# EAGLE board Relaydumped (EAGLE 9.1.2)
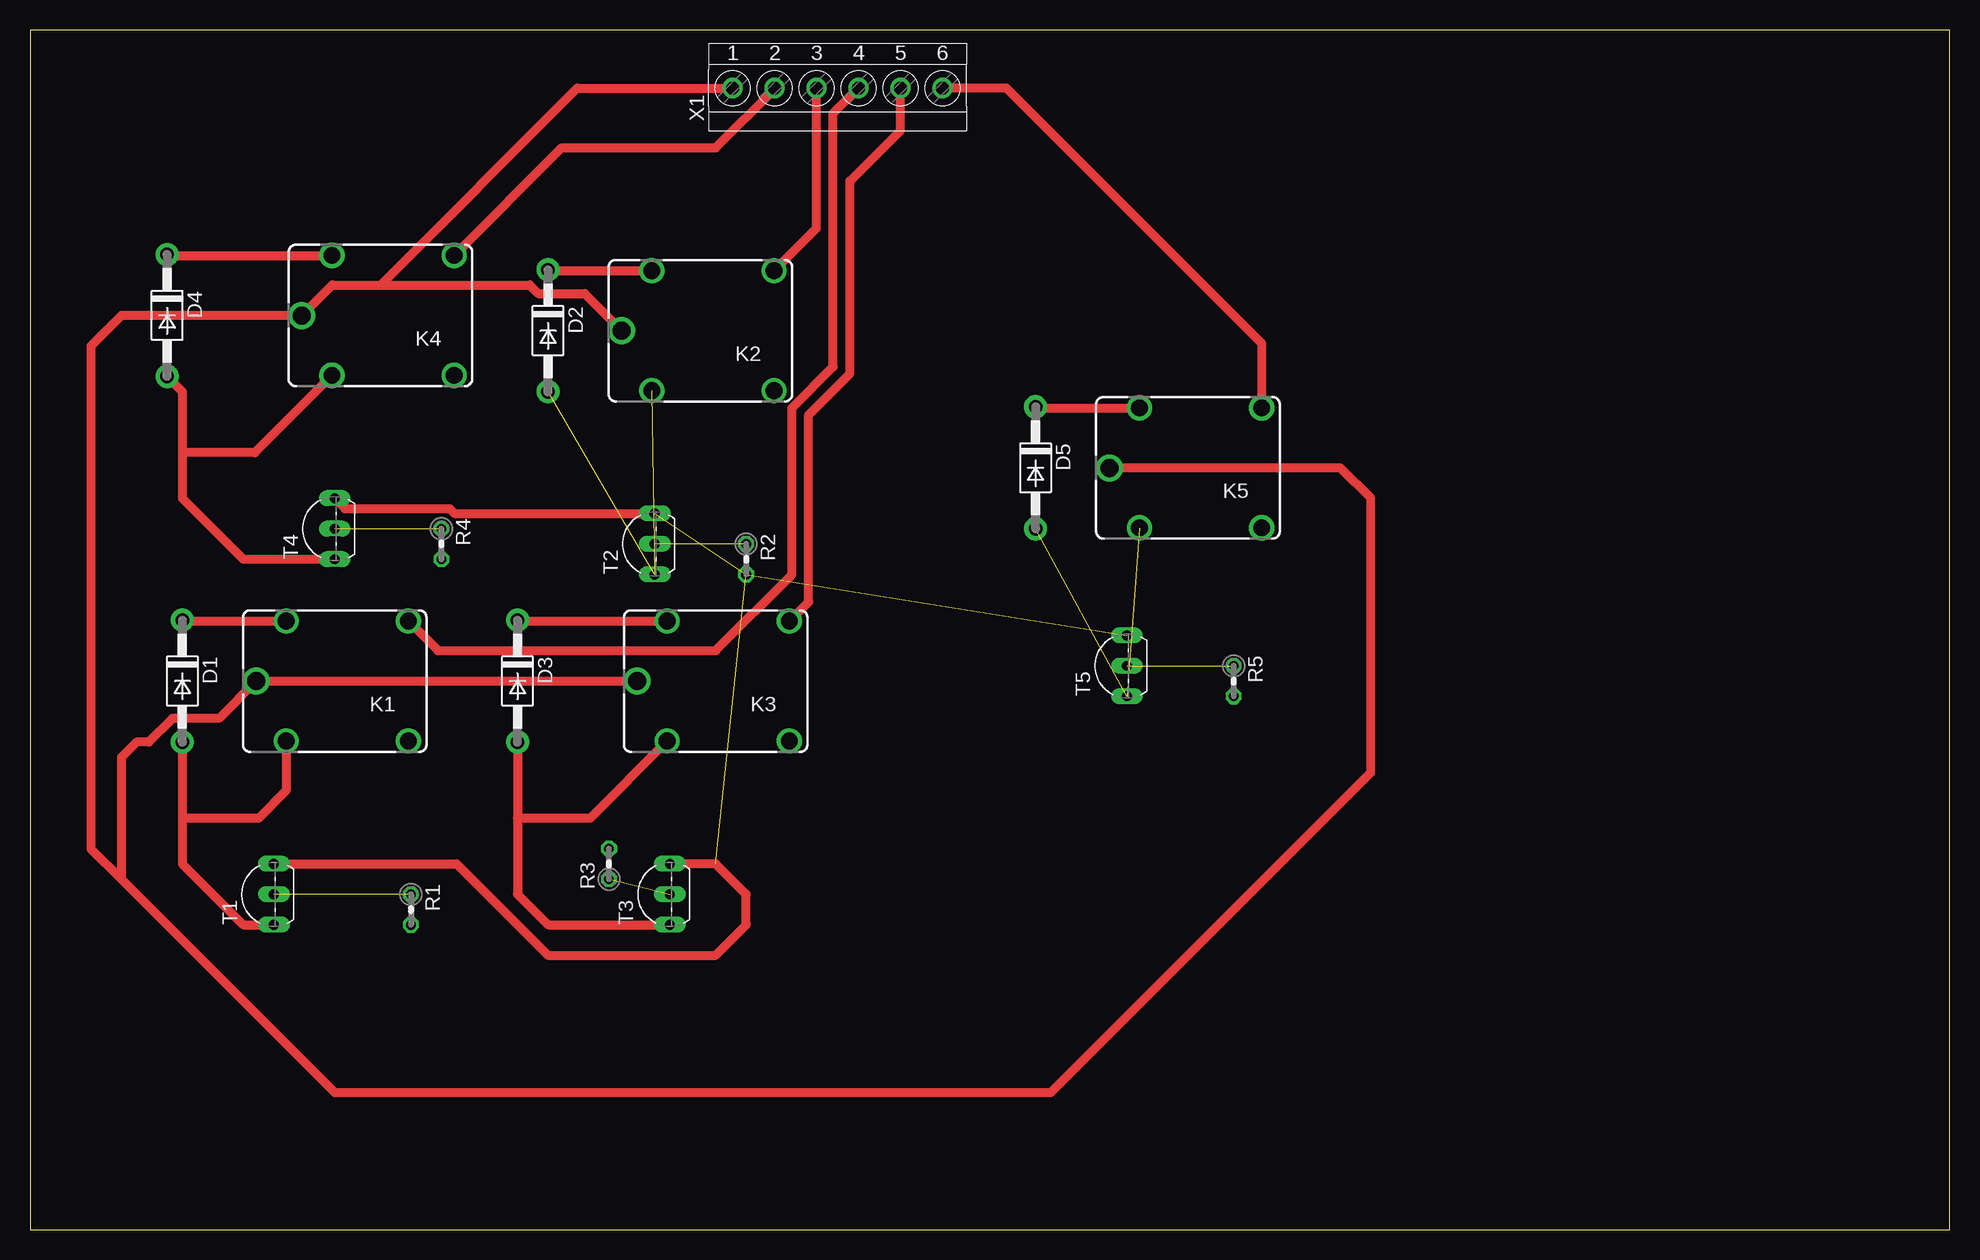
[diagram p0: board, top side]

Size 160 x 100 mm. Coordinates in mm from the lower left corner, seen from the top.
Outline: 0,0 160,0 160,100 0,100 0,0
Copper layers (1*16): Top 0.035mm / dielectric 1.5mm / Bottom 0.035mm
Design rules "default": minimum track width 6mil, minimum drill 0.35mm, track to track 6mil, track to pad 6mil, pad to pad 6mil, via to via 6mil, smd to smd 6mil, copper to edge 40mil, drill to drill 6mil, minimum pad ring 10mil, minimum via ring 8mil, stop-mask expansion 4mil, vias tented up to drill 0mil, thermal gap 10mil
Net classes: 1 Power: width 0.762 mm, drill 0.762 mm, clearance 0.635 mm; 2 Data: width 0.762 mm, drill 0.762 mm, clearance 0.635 mm

## Footprints (pad centres in the part's own frame; a part is rotated, then mirrored left to right if it is on the bottom)
DO41-10 = drill 1.118 pad 1.93: A 5.08,0; C -5.08,0
JJM = drill 1.4: 1 4.05,5; 2 4.05,-5; NO1 -6.15,5; NO2 -6.15,-5 | drill 1.5: C 6.55,0
0204V = drill 0.813 octagon: 1 -1.27,0; 2 1.27,0
TO92-EBC-OVAL = drill 0.813 long: B 0,-1.27; C 2.54,-1.27; E -2.54,-1.27
TERMINAL-BLOCK-6-PIN-3.5MM-ROUND-PAD = drill 1.1 pad 1.7: 1 -8.75,-0.1; 2 -5.25,-0.1; 3 -1.75,-0.1; 4 1.75,-0.1; 5 5.25,-0.1; 6 8.75,-0.1

## Placement (x,y rotation side)
D1  1N4004  [DO41-10]  12.7,45.72 270 top
D2  1N4004  [DO41-10]  43.18,74.93 270 top
D3  1N4004  [DO41-10]  40.64,45.72 270 top
D4  1N4004  [DO41-10]  11.43,76.2 270 top
D5  1N4004  [DO41-10]  83.82,63.5 270 top
K1  JJM2W-5V  [JJM]  25.4,45.72 180 top
K2  JJM2W-5V  [JJM]  55.88,74.93 180 top
K3  JJM2W-5V  [JJM]  57.15,45.72 180 top
K4  JJM2W-5V  [JJM]  29.21,76.2 180 top
K5  JJM2W-5V  [JJM]  96.52,63.5 180 top
R1  [0204V]  31.75,26.67 270 top
R2  [0204V]  59.69,55.88 270 top
R3  [0204V]  48.26,30.48 90 top
R4  [0204V]  34.29,57.15 270 top
R5  [0204V]  100.33,45.72 270 top
T1  2N2222  [TO92-EBC-OVAL]  19.05,27.94 90 top
T2  2N2222  [TO92-EBC-OVAL]  50.8,57.15 90 top
T3  2N2222  [TO92-EBC-OVAL]  52.07,27.94 90 top
T4  2N2222  [TO92-EBC-OVAL]  24.13,58.42 90 top
T5  2N2222  [TO92-EBC-OVAL]  90.17,46.99 90 top
X1  TERMINAL-BLOCK-3.5MM-6-PIN-ROUND-PAD  [TERMINAL-BLOCK-6-PIN-3.5MM-ROUND-PAD]  67.31,95.25 0 top

## Library data of the parts
D1-D5 R1-R5 T1-T5 = adafruit
K1-K5 = relay; OC_FARNELL: unknown; OC_NEWARK: unknown
X1 = Rembrandt Electronics - Terminal Block 3-5mm v1-0

## Nets
GND [Power]: R2.2 T1.C T2.C T3.C T4.C T5.C
N$1 [Data]: D1.A K1.1 T1.E
N$2 [Data]: R1.1 T1.B
N$3 [Data]: D2.A K2.1 T2.E
N$4 [Data]: R3.1 T3.B
N$5 [Data]: R2.1 T2.B
N$6 [Data]: D2.C K2.2
N$7 [Data]: D1.C K1.2
N$8 [Data]: D3.C K3.2
N$9 [Data]: D3.A K3.1 T3.E
N$10 [Data]: D4.C K4.2
N$11 [Data]: D4.A K4.1 T4.E
N$12 [Data]: R4.1 T4.B
N$14 [Data]: R5.1 T5.B
N$15 [Data]: D5.C K5.2
N$16 [Data]: D5.A K5.1 T5.E
N$26 [Data]: K5.NO2 X1.6
N$27 [Data]: K3.NO2 X1.5
N$28 [Data]: K1.NO2 X1.4
N$29 [Data]: K4.NO2 X1.2
N$31 [Data]: K2.NO2 X1.3
VCC: R4.2
VCC_1: R5.2
VCC_2: R3.2
VCCA [Power]: K1.C K2.C K3.C K4.C K5.C X1.1
VCCIO: R1.2

## Tracks (layer width: path | path; a pad name or v marks a point on that pad's centre or on a via)
GND  (3 unrouted)
  Top 0.762: T4.C 26.26,60.1 34.98,60.1 35.39,59.69 T2.C | T1.C 35.56,30.48 43.18,22.86 57.15,22.86 59.69,25.4 59.69,27.94 57.15,30.48 T3.C
N$1
  Top 0.762: D1.A 12.7,34.29 | 12.7,34.29 12.7,30.48 17.78,25.4 T1.E | K1.1 21.35,36.59 19.05,34.29 12.7,34.29
N$2  (1 unrouted)
N$3  (2 unrouted)
N$4  (1 unrouted)
N$5  (1 unrouted)
N$6
  Top 0.762: D2.C 43.26,79.93 K2.2
N$7
  Top 0.762: D1.C 12.78,50.72 K1.2
N$8
  Top 0.762: D3.C 40.72,50.72 K3.2
N$9
  Top 0.762: D3.A 40.64,34.29 | 40.64,34.29 40.64,27.94 43.18,25.4 T3.E | K3.1 46.67,34.29 40.64,34.29
N$10
  Top 0.762: D4.C 11.51,81.2 K4.2
N$11
  Top 0.762: D4.A 12.7,69.85 12.7,64.77 | 12.7,64.77 12.7,60.96 17.78,55.88 T4.E | 12.7,64.77 | K4.1 18.73,64.77 12.7,64.77
N$12  (1 unrouted)
N$14  (1 unrouted)
N$15
  Top 0.762: D5.C 83.9,68.5 K5.2
N$16  (2 unrouted)
N$26
  Top 0.762: K5.NO2 102.67,73.86 81.38,95.15 X1.6
N$27
  Top 0.762: K3.NO2 64.9,52.32 64.9,67.9 68.35,71.36 68.35,87.4 72.56,91.61 X1.5
N$28
  Top 0.762: K1.NO2 34.01,48.26 57.15,48.26 63.5,54.61 63.5,68.48 66.96,71.94 66.96,93.05 X1.4
N$29
  Top 0.762: K4.NO2 44.33,90.17 57.15,90.17 62.06,95.08 X1.2
N$31
  Top 0.762: K2.NO2 65.56,83.46 X1.3
VCCA
  Top 0.762: 29.21,78.74 25.2,78.74 K4.C 7.62,76.2 5.08,73.66 5.08,31.75 7.62,29.21 | 29.21,78.74 45.62,95.15 X1.1 | 7.62,29.21 7.62,39.37 8.89,40.64 9.9,40.64 11.88,42.62 15.75,42.62 K1.C K3.C | 7.62,29.21 25.4,11.43 85.09,11.43 111.76,38.1 111.76,60.96 109.22,63.5 K5.C | 29.21,78.74 41.65,78.74 42.36,78.03 46.23,78.03 K2.C